# Altium PCB PCB1.PcbDoc
Units mm, origin at the board's own origin, x right, y up, seen from the top; angles counter-clockwise.
Board outline 50 x 16 mm, 2 copper layers (Top Layer, Bottom Layer); 9 components, 7 nets, 27 pads, 0 vias.
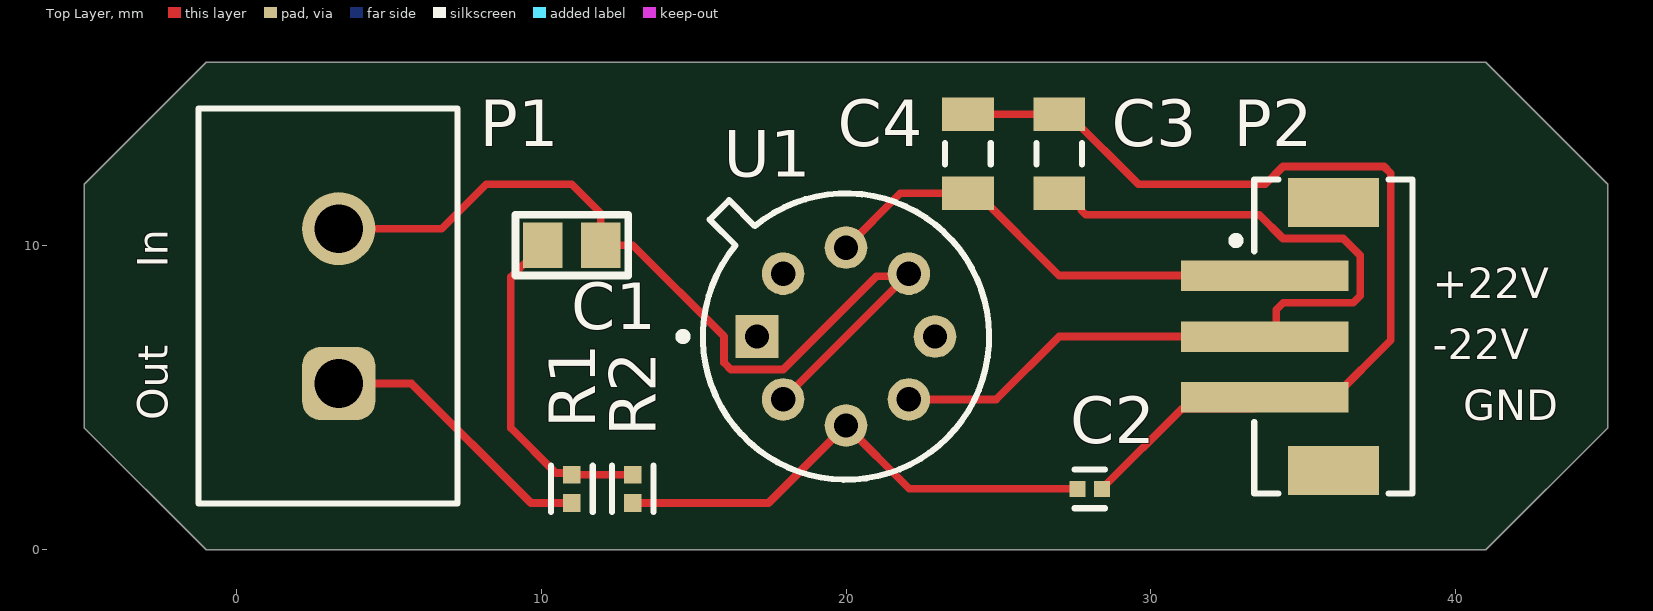
[diagram p0: Top Layer view]
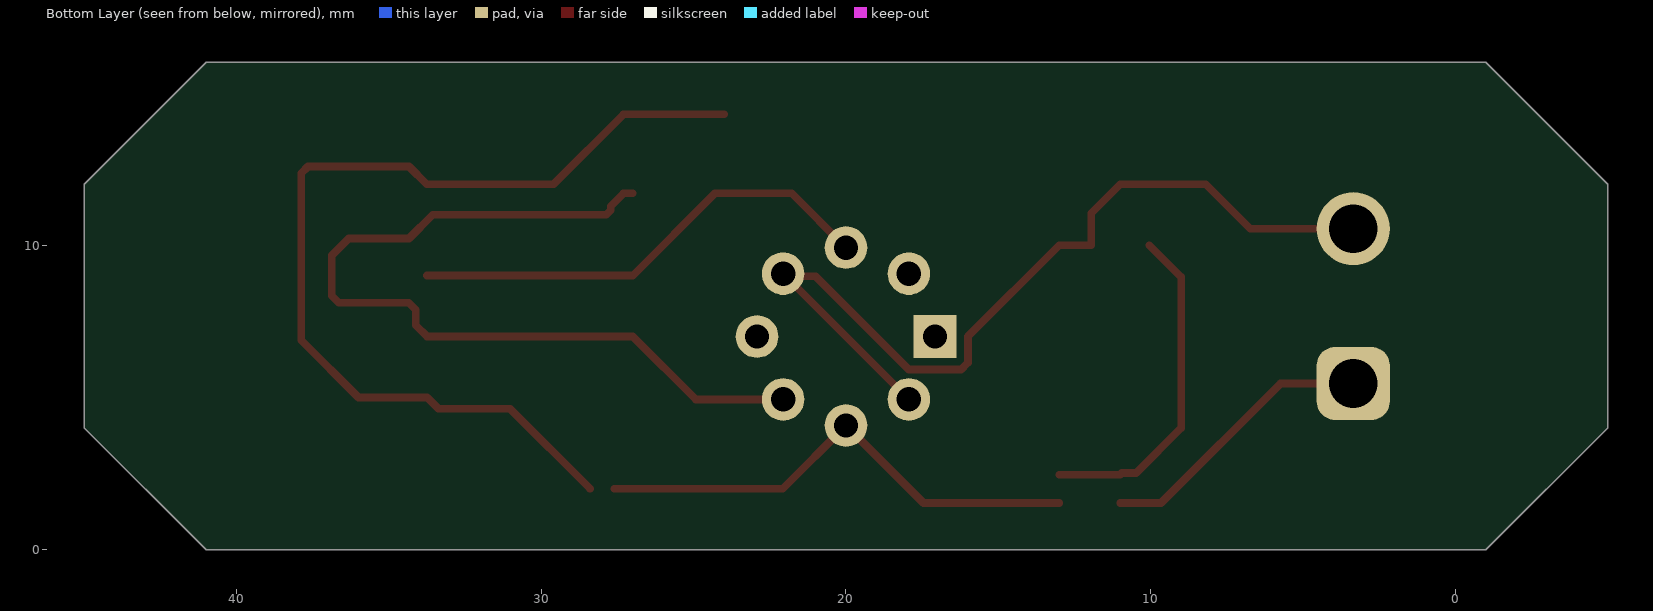
[diagram p1: Bottom Layer view, seen from below]
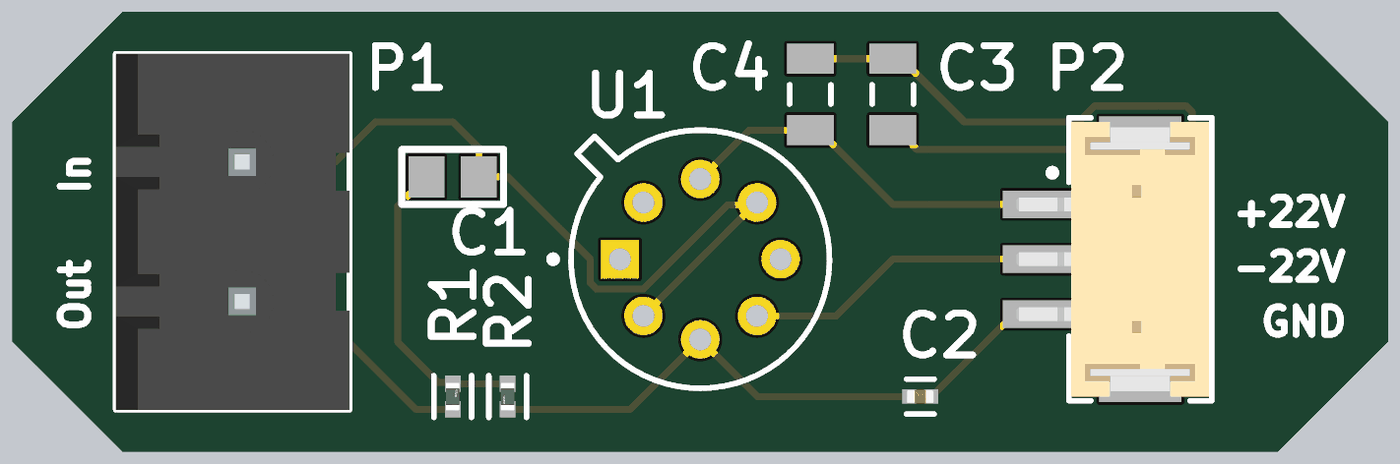
[diagram p2: 3D render of the assembled board from above, using the file's embedded part models]

## Layer stack, top to bottom
Top Solder: solder mask 0.0102, Solder Resist, Dk 3.5
Top Layer: signal copper 0.0356
Dielectric 1: dielectric 0.32, FR-4, Dk 4.8
Bottom Layer: signal copper 0.0356
Bottom Solder: solder mask 0.0102, Solder Resist, Dk 3.5

## Board outline
-5,4 -5,12 -1,16 41,16 45,12 45,4 41,0 -1,0

## Design rules (kind name [scope] priority, off if disabled: settings)
Clearance [All] p1: gap=0.254 ignorepadtopadclearanceinfootprint=FALSE except(0: Arc-Hole Track-Hole SMDPad-Hole THPad-Hole Via-Hole Fill-Hole Poly-Hole Region-Hole Text-Hole)
PolygonConnect [All] p1: connectstyle=Relief reliefconductorwidth=0.254 reliefentries=4 polygonreliefangle="90 Angle" airgapwidth=0.254
RoutingVias [All] p1: holewidth=0.711 width=1.27 viastyle="Through Hole" minholewidth=0.711 minwidth=1.27 maxholewidth=0.711 maxwidth=1.27
SolderMaskExpansion [All] p1: expansion=0.102 istentingtop=FALSE
Width [All] p1: maxlimit=0.254 minlimit=0.254 preferedwidth=0.254
30 further rules are at their usual default settings.

## Components (designator, comment, footprint, x,y, rotation, side; value= is the part's Value field where it differs from the comment)
C1 "Cap_0805" C_0805 11,10 r0 top
C2 "C0402C152K5RACTU" FP-C0402-BB-MFG 28,2 r0 top value="1,500 pF"
C3 "1206GC102KAT1A" AVX-1206-2_L 27,13 r270 top
C4 "1206GC102KAT1A" AVX-1206-2_L 24,13 r270 top
P1 "691701510002B" 691701510002B 3,8 r90 top
P2 "620303124022" 620303124022 36,7 r90 top
R1 "RG1005P-393-B-T5" FP-RG1005-IPC_B 11,2 r90 top
R2 "RG1005P-393-B-T5" FP-RG1005-IPC_B 13,2 r270 top
U1 "LM741H" LMC0008A 20,7 r0 top

## Footprints (in the part's own frame and the unit in brackets; to place one, negate y for a bottom-side part, rotate by r counter-clockwise, add the part's x,y. Pads: shape width x height; smd on the part's side, far side on the other; paste and mask are expansions set on the pad)
620303124022 [mm] "2.00mm SMT Male Vertical Shrouded Header, 3p"
  rect 1x5.5 smd: 1(2,2.25) 2(0,2.25) 3(-2,2.25)
  rect 1.6x3 smd: MP1(-4.4,0) MP2(4.4,0)
  silkscreen extent -5.15,-2.6 5.15,3.32, body extent -5,-2.5 5,4.51, height 6.77
691701510002B [mm] "THR - 5,08mm - PCB Vertical Close - 02p"
  rrect50% 2.4x2.4 hole 1.6: 1(-2.54,-0.35)
  round 2.4 hole 1.6: 2(2.54,-0.35)
  silkscreen extent -6.48,-4.25 6.48,4.25, body extent -6.48,-4.25 6.48,4.25, height 12.1
AVX-1206-2_L [mm] "SMD, 2-Leads, Body 3.4x1.8mm, IPC High Density"
  rect 1.1x1.7 smd: 1(-1.3,0) 2(1.3,0)
  silkscreen extent -0.35,-0.75 0.35,0.75, body extent -1.7,-0.9 1.7,0.9, height 1.52
C_0805 [mm]
  rect 1.3x1.5 smd: 1(-0.95,0) 2(0.95,0)
  silkscreen extent -1.85,-1 1.85,1, body extent -1,-0.63 1,0.63, height 0.65
FP-C0402-BB-MFG [mm]
  rect 0.52x0.52 smd paste+0 mask+0: 1(-0.4,0) 2(0.4,0)
  silkscreen extent -0.5,-0.64 0.5,0.64, body extent -0.8,-0.4 0.8,0.4, height 0.25
FP-RG1005-IPC_B [mm]
  rect 0.589x0.572 smd paste+0 mask+0: 1(-0.464,0) 2(0.464,0)
  silkscreen extent -0.76,-0.69 0.76,0.69, body extent -0.91,-0.44 0.91,0.44, height 0.25
LMC0008A [mm] "Can, 8-Leads, Pin Circle Dia. 5.84mm, Lead Dia. 0.48mm (max)"
  rect 1.4x1.4 hole 0.8: 1(-2.92,0)
  round 1.4 hole 0.8: 2(-2.065,-2.065) 3(0,-2.92) 4(2.065,-2.065) 5(2.92,0) 6(2.065,2.065) 7(0,2.92) 8(-2.065,2.065)
  silkscreen extent -5.47,-4.7 4.7,4.7, body extent -4.7,-4.7 4.7,4.7, height 5.08

## Part data
C2: library part CMP-2008-03108-2, "CAP CER 1500PF 50V X7R 0402", Capacitance="1,500 pF", Manufacturer=Kemet, Package=C0402-BB, Temperature="-55°C to +125°C", Temperature Characteristic=X7R, Temperature Coefficient=15%, Temperature Range High=+125°C, Temperature Range Low=-55°C, Tolerance=0.1, Voltage Rating="50 V", Automotive=No, Category=Cap, ComponentLink2Description=Datasheet, ComponentLink2URL=https://content.kemet.com/datasheets/KEM_C1002_X7R_SMD.pdf, Device Class L1="Passive Components", Device Class L2=Capacitors, Device Class L3="Ceramic Capacitors", Digikey Description="CAP CER 1500PF 50V X7R 0402", Height=0.55mm, Ipc Land Pattern Name=CAPC10050X50, Lead Free=Yes, Manufacturer Part Number=C0402C152K5RACTU, Material=Ceramic, Mouser Description="Multilayer Ceramic Capacitors MLCC - SMD/SMT 50volts 1500pF X7R 10%", Octopart=https://octopart.com/c0402c152k5ractu-kemet-125298, RoHS=TRUE
C3 C4: library part CMP-2000-05468-1, "Chip Capacitor, 1 nF, +/- 10%, -55 to 125 degC, 1206 (3216 Metric), RoHS, Tape and Reel", Capacitance=0.001uF, Case Size/Dimension=1206, Dielectric=X7R, Manufacturer=AVX, Package Description="2-Pin SMD, Body 3.4 x 1.8 mm", Rated Voltage=2000V, Tolerance=10%, Tolerance (%)=±10%, Datasheet URL=https://datasheet.ciiva.com/11787/0900766b80ed4c37-11787781.pdf, Datasheet Version=11/2010, Manufacturer URL=http://www.avx.com/, Mounting Technology=SurfaceMount, Package Reference=1206, PartNumber=1206GC102KAT1A, Voltage Rating DC=2000V
P1: library part CMP-1502-02329-2, Color=Black, Current Rating=10A, Max Operating Temperature=105°C, Min Operating Temperature=-40°C, Voltage Rating=300V, Connector Type="Terminal Block", Contact Gender=Male, Contact Material=Brass, Contact Plating=Tin, Gender=Male, Housing Material=Polymer, Lead Pitch=5.08mm, Length=12.96mm, Mount="Through Hole", NexarPartId=22866752, Number of Contacts=2, Number of Pins=2, Pitch=5.08mm, REACH SVHC=Unknown, RoHS=Compliant, Termination=PCB
P2: library part CMP-1502-00661-2, Color="Beige, White", Contact Resistance=20mΩ, Current Rating=2A, Flammability Rating="UL94 V-0", Insulation Resistance=1GΩ, Max Operating Temperature=85°C, Min Operating Temperature=-40°C, Operating Supply Voltage=100V, Voltage Rating=125V, Connector Type="Male Pin", Contact Gender=Male, Contact Material=Copper, Contact Mating Length=3.5052mm, Contact Plating=Tin, Gender=Male, Height=6.6mm, Housing Material=Nylon, Insulation=Insulated, Lead Free="Lead Free", Lead Pitch=2mm, Length=7mm, Mount="Surface Mount", NexarPartId=18818243, Number of Contacts=3, Number of Pins=3, Number of Positions=3, Number of Rows=1, Orientation=Vertical, Packaging="Tape and Reel", Pitch=2mm, REACH SVHC=Unknown, RoHS=Compliant, Termination=SMD/SMT, Width=9.9mm
R1 R2: library part CMP-2002-01450-2, "Automotive Metal Thin Film Chip Resistor, 0402, 39kΩ, 0.1%, 25ppm/°C, 0.0625W, 75V", Case Code (Imperial)=0402, Case Code (Metric)=1005, Max Operating Temperature=155°C, Max Power Dissipation=63mW, Min Operating Temperature=-55°C, Resistance=39kR, Resistance Tolerance=0.1%, Resistor Type="Thin Film", Temperature Coefficient=25ppm/°C, Voltage Rating=75V, Voltage Rating (DC)=25V, Case/Package=0402, Features="Automotive AEC-Q200", Height=0.35mm, Lead Free="Lead Free", Length=1mm, Number of Pins=2, Number of Terminations=2, Packaging="Tape and Reel", Power Rating=63mW, RoHS Compliant=Yes, Series=RG, Size Code=0402, Termination=SMD/SMT, Tolerance=0.1%, Weight=2.3E-05oz, Width=0.5mm
U1: library part CMP-0055-00031-3, "Operational Amplifier, 8-pin TO-99", Manufacturer="Texas Instruments", Package Reference=LMC0008A, PackageTopMarking="NSZXYTTE# LM741H", PowerWise=N, Code_JEDEC=TO-99, ComponentLink1Description="Datasheet URL", ComponentLink1URL=http://www.ti.com/general/docs/lit/getliterature.tsp?genericPartNumber=LM741&fileType=pdf, CompType=Amplifiers, PackageDescription="Metal Can, TO-99, 8 Lead, .200 Dia., P.C.", PinCount=8, RoHS=N

## Nets (pads, with @x,y where several pads share a name; then routed paths per layer and width w, separated by ;. In a path a pad name is that pad's centre, name@x,y a point inside that pad or via, vN(x,y) a via of type N, cw(c..) or ccw(c..) an arc to the next point about the centre after c; other vN are vias at no path point)
NetC1_1: C1.1 R1.2 R2.1 | length 11.1
  Top Layer w0.254: C1.1 9,8.95 9,4 10.482,2.518 10.945,2.518 R1.2 R2.1
NetC1_2: C1.2 P1.2 U1.2 U1.6 | length 30.2
  Top Layer w0.254: P1.2 6.735,10.54 8.195,12 11,12 11.95,11.05 C1.2 13,10 15.999,7.001 15.999,6.142 16.222,5.919 17.938,5.919 21,8.981 21.981,8.981 U1.6 U1.2 U1.2@18.016,5.016
NetC2_1: C2.1 R2.2 U1.3 | length 16.5
  Top Layer w0.254: R2.2 17.457,1.536 U1.3 22.08,2 C2.1
NetC2_2: C2.2 C3.1 C4.1 P2.3 | length 32.1
  Top Layer w0.254: C4.1 C3.1 27.3,14.3 29.6,12 33.761,12 34.342,12.581 37.658,12.581 37.881,12.358 37.881,6.881 36,5 P2.3 33.377,4.627 31.027,4.627 C2.2
NetC3_2: C3.2 P2.2 U1.4 | length 28.6
  Top Layer w0.254: U1.4 24.935,4.935 27,7 P2.2 34.119,7.369 34.119,7.881 34.35,8.112 36.65,8.112 36.881,8.342 36.881,9.658 36.32,10.219 34.342,10.219 33.561,11 27.872,11 27.723,11.149 27.723,11.277 27.3,11.7 C3.2
NetC4_2: C4.2 P2.1 U1.7 | length 15.6
  Top Layer w0.254: U1.7 21.78,11.7 C4.2 24.3,11.7 27,9 P2.1
NetP1_1: P1.1 R1.1 | length 9.3
  Top Layer w0.254: P1.1 5.736,5.46 9.659,1.536 R1.1
pads on no net: P2.MP1 P2.MP2 U1.1 U1.5 U1.8

## Silkscreen, mask and mechanical layers (free items; w line width, h text height)
Top Overlay:
  text "In" at -2.254,9.254 h1 r90
  text "+22V" at 39.254,8.254 h1
  text "-22V" at 39.254,6.254 h1
  text "Out" at -2.254,4.254 h1 r90
  text "GND" at 40.254,4.254 h1
Mechanical 1:
  the board outline again, w0.254